# Altium PCB PCB1-C.PcbDoc (part 1 of 4)
Units mil, origin at the board's own origin, x right, y up, seen from the top; angles counter-clockwise.
Board outline 2476.38 x 3779.53 mil, 2 copper layers (Top Layer, Bottom Layer); 106 components, 105 nets, 404 pads, 256 vias.
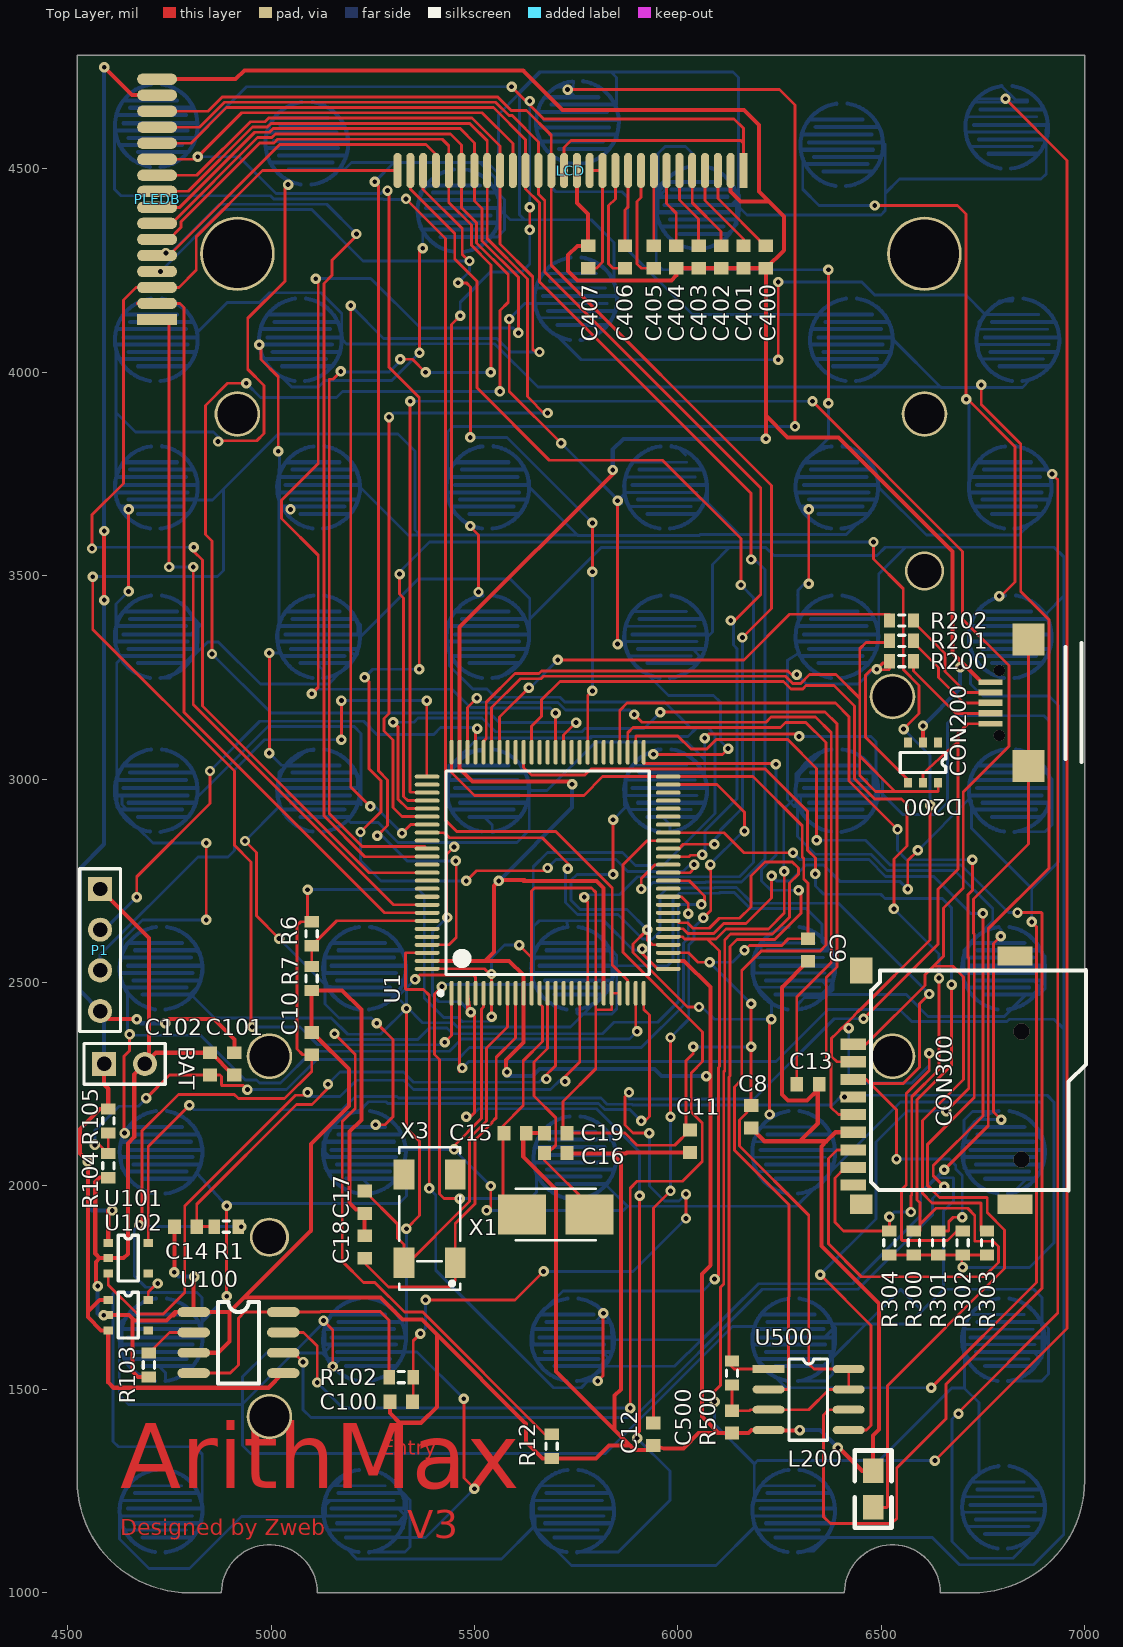
[diagram p0: Top Layer view]
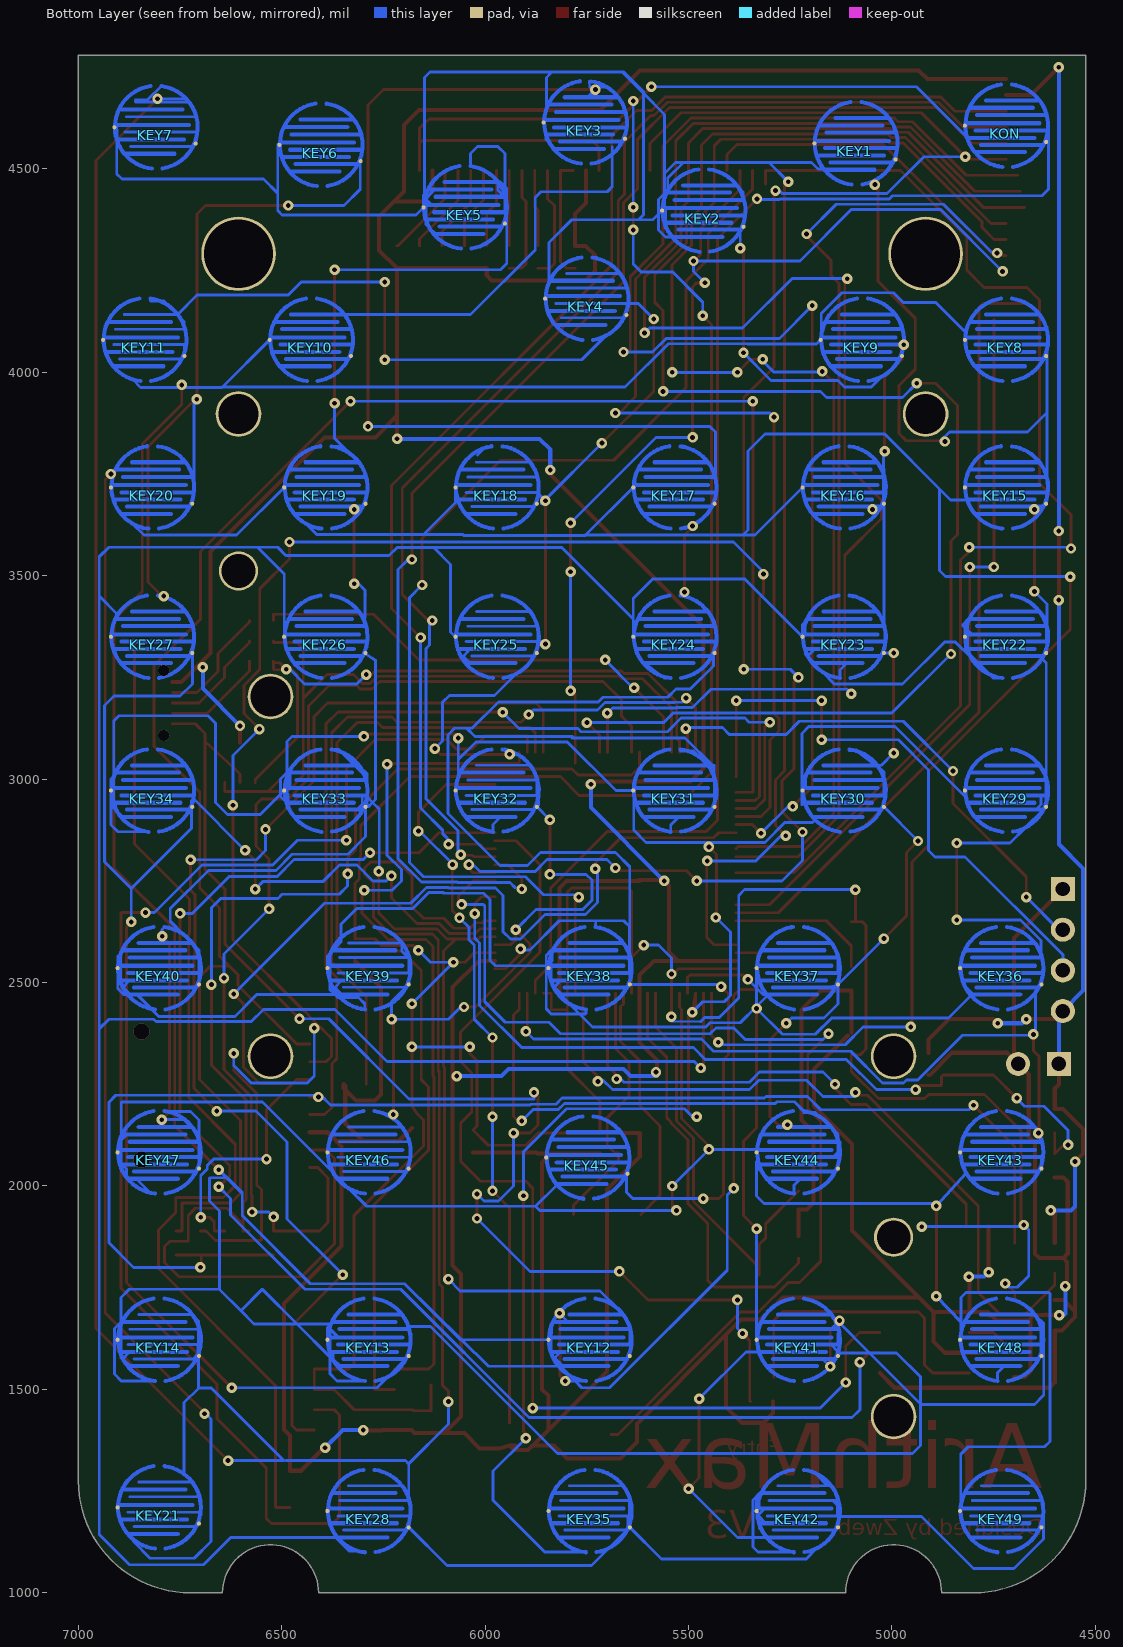
[diagram p1: Bottom Layer view, seen from below]

## Layer stack, top to bottom
Top Layer: signal copper 1.4
Dielectric: dielectric 12.6, FR-4, Dk 4.8
Bottom Layer: signal copper 1.4

## Board outline
4523.62,1275.59 ccw(c4799.21,1275.59) 4799.21,1000 4877.95,1000 cw(c4996.06,1000) 5114.17,1000 6409.45,1000 cw(c6527.56,1000) 6645.67,1000 6724.41,1000 ccw(c6724.41,1275.59) 7000,1275.59 7000,4779.53 4523.62,4779.53

## Design rules (kind name [scope] priority, off if disabled: settings)
Clearance [All] p1: gap=6
HoleSize [All] p1: absolutevalues=TRUE maxlimit=250 minlimit=11.81 maxpercent=80.000 minpercent=20.000
MinimumSolderMaskSliver [All] p1 off: minsoldermaskwidth=10
NetAntennae [All] p1 off: netantennaetolerance=0
PolygonConnect [All] p1: connectstyle=Relief reliefconductorwidth=10 reliefentries=4 polygonreliefangle="90 Angle"
RoutingVias [All] p1: holewidth=11.81 width=25.59 viastyle="Through Hole" minholewidth=11.81 minwidth=25.59 maxholewidth=11.81 maxwidth=25.59
SilkscreenOverComponentPads [All] p1: minsilkscreentomaskgap=10
SolderMaskExpansion [All] p1: expansion=4
Width [All] p1: maxlimit=20 minlimit=6 preferedwidth=7
24 further rules are at their usual default settings.

## Components (designator, comment, footprint, x,y, rotation, side; value= is the part's Value field where it differs from the comment)
BAT "Header 2" HDR1X2 4590,2300 r0 top
C8 "104" 1608[0603] 6180,2170 r270 top
C9 "104" 1608[0603] 6320,2580 r270 top
C10 "104" 1608[0603] 5100,2350 r90 top
C11 "104" 1608[0603] 6030,2110 r270 top
C12 "2.2uF" 1608[0603] 5940,1390 r270 top
C13 "2.2uF" 1608[0603] 6320,2250 r0 top
C14 "104" 1608[0603] 4790,1900 r0 top
C15 "22pF" 1608[0603] 5600,2130 r0 top
C16 "22pF" 1608[0603] 5700,2081 r0 top
C17 "12pF" 1608[0603] 5230,1960 r270 top
C18 "12pF" 1608[0603] 5230,1850 r90 top
C19 "4.7uF" 1608[0603] 5700,2130 r180 top
C100 "105" 1608[0603] 5320,1470 r0 top
C101 "105" 1608[0603] 4910,2300 r90 top
C102 "0.1uF" 1608[0603] 4850,2300 r270 top
C400 "2.2uF" 1608[0603] 6216.54,4283.46 r90 top
C401 "2.2uF" 1608[0603] 6161.42,4283.46 r90 top
C402 "2.2uF" 1608[0603] 6106.3,4283.46 r90 top
C403 "2.2uF" 1608[0603] 6051.18,4283.46 r90 top
C404 "2.2uF" 1608[0603] 5996.06,4283.46 r90 top
C405 "2.2uF" 1608[0603] 5940.94,4283.46 r90 top
C406 "0.1uF" 1608[0603] 5870.08,4283.46 r90 top
C407 "0.1uF" 1608[0603] 5779.53,4283.46 r270 top
C500 "104" 1608[0603] 6133.15,1420 r270 top
CON200 "USB-MINIAB" USB-MICRO 6874.02,3187.32 r90 top
CON300 "TF" TF-2 6630,2260 r0 top
D200 "AZC099-04S" SOT-23-6 6640,3090 r270 top
KEY1 "Button" Button#1 5311.02,4562.99 r180 bottom
KEY2 "Button" Button#2 5685.04,4397.64 r180 bottom
KEY3 "Button" Button#3 5976.38,4614.17 r180 bottom
KEY4 "Button" Button#4 5972.44,4181.1 r180 bottom
KEY5 "Button" Button#5 6271.65,4405.51 r180 bottom
KEY6 "Button" Button#6 6625.98,4559.06 r180 bottom
KEY7 "Button" Button#7 7031.5,4602.36 r180 bottom
KEY8 "Button" Button#8 4941,4080 r180 bottom
KEY9 "Button" Button#9 5295.28,4080 r180 bottom
KEY10 "Button" Button#10 6649.61,4080 r180 bottom
KEY11 "Button" Button#11 7059.06,4080 r180 bottom
KEY12 "Button" Button#12 5964.5,1622 r180 bottom
KEY13 "Button" Button#13 6507.9,1622 r180 bottom
KEY14 "Button" Button#14 7023.6,1622 r180 bottom
KEY15 "Button" Button#15 4941,3717 r180 bottom
KEY16 "Button" Button#16 5340,3717 r180 bottom
KEY17 "Button" Button#17 5756,3717 r180 bottom
KEY18 "Button" Button#18 6193,3717 r180 bottom
KEY19 "Button" Button#19 6614,3717 r180 bottom
KEY20 "Button" Button#20 7040,3717 r180 bottom
KEY21 "Button" Button#21 7023.6,1210 r180 bottom
KEY22 "Button" Button#22 4941,3350 r180 bottom
KEY23 "Button" Button#23 5340,3350 r180 bottom
KEY24 "Button" Button#24 5756,3350 r180 bottom
KEY25 "Button" Button#25 6193,3350 r180 bottom
KEY26 "Button" Button#26 6614,3350 r180 bottom
KEY27 "Button" Button#27 7040,3350 r180 bottom
KEY28 "Button" Button#28 6507.9,1201 r180 bottom
KEY29 "Button" Button#29 4941,2972 r180 bottom
KEY30 "Button" Button#30 5340,2972 r180 bottom
KEY31 "Button" Button#31 5756,2972 r180 bottom
KEY32 "Button" Button#32 6193,2972 r180 bottom
KEY33 "Button" Button#33 6614,2972 r180 bottom
KEY34 "Button" Button#34 7040,2972 r180 bottom
KEY35 "Button" Button#35 5964.5,1201 r180 bottom
KEY36 "Button" Button#36 4952.7,2535.4 r180 bottom
KEY37 "Button" Button#37 5452.7,2535.4 r180 bottom
KEY38 "Button" Button#38 5964.5,2535.4 r180 bottom
KEY39 "Button" Button#39 6507.9,2535.4 r180 bottom
KEY40 "Button" Button#40 7023.6,2535.4 r180 bottom
KEY41 "Button" Button#41 5452.7,1622 r180 bottom
KEY42 "Button" Button#42 5452.7,1201 r180 bottom
KEY43 "Button" Button#43 4952.7,2082.7 r180 bottom
KEY44 "Button" Button#44 5452.7,2082.7 r180 bottom
KEY45 "Button" Button#45 5970,2070 r180 bottom
KEY46 "Button" Button#46 6507.9,2082.7 r180 bottom
KEY47 "Button" Button#47 7023.6,2082.7 r180 bottom
KEY48 "Button" Button#48 4952.7,1622 r180 bottom
KEY49 "Button" Button#49 4952.7,1201 r180 bottom
KON "Button" Button#50 4941,4606.3 r180 bottom
L200 "BLM21PG221SN1" 0805 6480,1210 r90 top
LCD "FPC-QSG9631" LCD_28P 6161.42,4496.06 r270 top
P1 "Header 4" HDR1X4 4580,2730 r270 top
PLEDB "Header 16" CON_16P_1.0MM 4720,4130 r180 top
R1 "10K" J1-0603 4890,1900 r0 top
R6 "NC" J1-0603 5100,2620 r90 top
R7 "10K" J1-0603 5100,2510 r90 top
R12 "0R" J1-0603 5690,1360 r270 top
R102 "0.4R" J1-0603 5320,1530 r0 top
R103 "5K" J1-0603 4700,1560 r90 top
R104 "1M" J1-0603 4600,2050 r90 top
R105 "1M" J1-0603 4600,2160 r90 top
R200 "22R" J1-0603 6550,3290 r0 top
R201 "22R" J1-0603 6550,3340 r0 top
R202 "0R" J1-0603 6550,3390 r0 top
R300 "47K" J1-0603 6580,1860 r270 top
R301 "47K" J1-0603 6640,1860 r270 top
R302 "47K" J1-0603 6700,1860 r270 top
R303 "47K" J1-0603 6760,1860 r270 top
R304 "47K" J1-0603 6520,1860 r270 top
R500 "10K" J1-0603 6133.15,1540 r270 top
U1 "STM32F407VG" 100T1_L 5680,2770 r90 top
U100 "TP4056" SO-8 4810,1690 r0 top
U101 "ME6219" SOT-23-5 4600,1860 r0 top
U102 "ME6219" SOT-23-5 4600,1720 r0 top
U500 "W25X64" SOIC8 6223.15,1550 r0 top
X1 "25MHz" 5032 5700,1930 r180 top
X3 "MC306-G-06Q-32.768 (manufacturer JFVNY)" SM8 5390,1920 r90 top

## Footprints (in the part's own frame and the unit in brackets; to place one, negate y for a bottom-side part, rotate by r counter-clockwise, add the part's x,y. Pads: shape width x height; smd on the part's side, far side on the other; paste and mask are expansions set on the pad)
100T1_L [mm] "100-Pin Thin Quad Flat Pack 0.5 mm Pitch, IPC High Density"
  oval 1.55x0.25 smd: 1(-7.525,6) 2(-7.525,5.5) 3(-7.525,5) 4(-7.525,4.5) 5(-7.525,4) 6(-7.525,3.5) 7(-7.525,3) 8(-7.525,2.5) 9(-7.525,2) 10(-7.525,1.5) 11(-7.525,1) 12(-7.525,0.5) 13(-7.525,0) 14(-7.525,-0.5) 15(-7.525,-1) 16(-7.525,-1.5) 17(-7.525,-2) 18(-7.525,-2.5) 19(-7.525,-3) 20(-7.525,-3.5) 21(-7.525,-4) 22(-7.525,-4.5) 23(-7.525,-5) 24(-7.525,-5.5) 25(-7.525,-6) 51(7.525,-6) 52(7.525,-5.5) 53(7.525,-5) 54(7.525,-4.5) 55(7.525,-4) 56(7.525,-3.5) 57(7.525,-3) 58(7.525,-2.5) 59(7.525,-2) 60(7.525,-1.5) 61(7.525,-1) 62(7.525,-0.5) 63(7.525,0) 64(7.525,0.5) 65(7.525,1) 66(7.525,1.5) 67(7.525,2) 68(7.525,2.5) 69(7.525,3) 70(7.525,3.5) 71(7.525,4) 72(7.525,4.5) 73(7.525,5) 74(7.525,5.5) 75(7.525,6)
  oval 0.25x1.55 smd: 26(-6,-7.525) 27(-5.5,-7.525) 28(-5,-7.525) 29(-4.5,-7.525) 30(-4,-7.525) 31(-3.5,-7.525) 32(-3,-7.525) 33(-2.5,-7.525) 34(-2,-7.525) 35(-1.5,-7.525) 36(-1,-7.525) 37(-0.5,-7.525) 38(0,-7.525) 39(0.5,-7.525) 40(1,-7.525) 41(1.5,-7.525) 42(2,-7.525) 43(2.5,-7.525) 44(3,-7.525) 45(3.5,-7.525) 46(4,-7.525) 47(4.5,-7.525) 48(5,-7.525) 49(5.5,-7.525) 50(6,-7.525) 76(6,7.525) 77(5.5,7.525) 78(5,7.525) 79(4.5,7.525) 80(4,7.525) 81(3.5,7.525) 82(3,7.525) 83(2.5,7.525) 84(2,7.525) 85(1.5,7.525) 86(1,7.525) 87(0.5,7.525) 88(0,7.525) 89(-0.5,7.525) 90(-1,7.525) 91(-1.5,7.525) 92(-2,7.525) 93(-2.5,7.525) 94(-3,7.525) 95(-3.5,7.525) 96(-4,7.525) 97(-4.5,7.525) 98(-5,7.525) 99(-5.5,7.525) 100(-6,7.525)
  silkscreen extent -7.65,-6.35 6.35,6.8, body extent -7,-7 7,7, height 1.05
0805 [mil]
  rect 60x50 smd: 1(0,0) 2(90,0)
  silkscreen extent -50,-45 140,45
1608[0603] [mm] "Chip Capacitor, Body 1.6x0.8mm, IPC High Density"
  rect 0.8x0.9 smd: 1(-0.7,0) 2(0.7,0)
  body extent -0.87,-0.48 0.87,0.48, height 1.3
5032 [mm]
  rect 3x2.5 smd: 1(-2.1,0) 2(2.1,0)
  silkscreen extent -2.5,-1.6 2.5,1.6
Button#1 [mil]
  round 10 smd: 1(120,0) 2(320,-40)
  Top Layer lines w10: 320.19,-12 320.02,-12 319.02,-12 294.03,-12 146,-12 ; 319,26 150,26 ; 312,-47 292.02,-47 285.03,-47 160,-47 ; 304,6 126,6 ; 303,62 172,62 ; 291,-30 140.02,-30 127,-30 ; 287,44 158.03,44 134,44 ; 268,-65 149,-65 ; 324.51,-6.5 ccw(c222.55,-0.14) 321.16,26.58 ; 324.51,-6.5 cw(c222.55,-0.14) 320.19,-30.19 ; 324.51,-6.5 cw(c222.55,-0.14) 320.19,-30.19 ; 324.51,-6.5 cw(c222.55,-0.14) 320.19,-30.19 ; 324.51,-6.5 ccw(c222.55,-0.14) 321.16,26.58 ; 324.51,-6.5 cw(c222.55,-0.14) 320.19,-30.19 ; 324.51,-6.5 ccw(c222.55,-0.14) 321.16,26.58 ; 324.51,-6.5 ccw(c222.55,-0.14) 321.16,26.58 ; 321.16,26.58 ccw(c222.55,-0.14) 320.19,29.92 ; 321.16,26.58 ccw(c222.55,-0.14) 320.19,29.92 ; 321.16,26.58 ccw(c222.55,-0.14) 320.19,29.92 ; 321.16,26.58 ccw(c222.55,-0.14) 320.19,29.92 ; 320.19,-30.19 cw(c222.55,-0.14) 320.02,-30.73 ; 320.19,-30.19 cw(c222.55,-0.14) 320.02,-30.73 ; 320.19,-30.19 cw(c222.55,-0.14) 320.02,-30.73 ; 320.19,-30.19 cw(c222.55,-0.14) 320.02,-30.73 ; 320.19,29.92 ccw(c222.55,-0.14) 320.02,30.46 ; 320.19,29.92 ccw(c222.55,-0.14) 320.02,30.46 ; 320.19,29.92 ccw(c222.55,-0.14) 320.02,30.46 ; 320.19,29.92 ccw(c222.55,-0.14) 320.02,30.46 ; 320.02,-30.73 cw(c222.55,-0.14) 318.16,-36.13 ; 320.02,-30.73 cw(c222.55,-0.14) 318.16,-36.13 ; 320.02,-30.73 cw(c222.55,-0.14) 318.16,-36.13 ; 320.02,-30.73 cw(c222.55,-0.14) 318.16,-36.13 ; 320.02,30.46 ccw(c222.55,-0.14) 305.5,59.5 ; 320.02,30.46 ccw(c222.55,-0.14) 305.5,59.5 ; 320.02,30.46 ccw(c222.55,-0.14) 305.5,59.5 ; 320.02,30.46 ccw(c222.55,-0.14) 305.5,59.5 ; 318.16,-36.13 cw(c222.55,-0.14) 314.65,-44.35 ; 318.16,-36.13 cw(c222.55,-0.14) 314.65,-44.35 ; 318.16,-36.13 cw(c222.55,-0.14) 314.65,-44.35 ; 318.16,-36.13 cw(c222.55,-0.14) 314.65,-44.35 ; 314.65,-44.35 cw(c222.55,-0.14) 313.67,-46.33 ; 314.65,-44.35 cw(c222.55,-0.14) 313.67,-46.33 ; 314.65,-44.35 cw(c222.55,-0.14) 313.67,-46.33 ; 314.65,-44.35 cw(c222.55,-0.14) 313.67,-46.33 ; 313.67,-46.33 cw(c222.55,-0.14) 238.02,-101.12 ; 313.67,-46.33 cw(c222.55,-0.14) 238.02,-101.12 ; 313.67,-46.33 cw(c222.55,-0.14) 238.02,-101.12 ; 313.67,-46.33 cw(c222.55,-0.14) 238.02,-101.12 ; 305.5,59.5 ccw(c222.55,-0.14) 305.02,60.16 ; 305.5,59.5 ccw(c222.55,-0.14) 305.02,60.16 ; 305.5,59.5 ccw(c222.55,-0.14) 305.02,60.16 ; 305.5,59.5 ccw(c222.55,-0.14) 305.02,60.16 ; 305.02,60.16 ccw(c222.55,-0.14) 303.64,62 ; 305.02,60.16 ccw(c222.55,-0.14) 303.64,62 ; 305.02,60.16 ccw(c222.55,-0.14) 303.64,62 ; 305.02,60.16 ccw(c222.55,-0.14) 303.64,62 ; 303.64,62 ccw(c222.55,-0.14) 235.89,101.15 ; 303.64,62 ccw(c222.55,-0.14) 235.89,101.15 ; 303.64,62 ccw(c222.55,-0.14) 235.89,101.15 ; 303.64,62 ccw(c222.55,-0.14) 235.89,101.15 ; 211.96,-101.38 cw(c223.45,0.14) 144.74,-65 ; 211.96,-101.38 cw(c223.45,0.14) 144.74,-65 ; 211.96,-101.38 cw(c223.45,0.14) 144.74,-65 ; 211.96,-101.38 cw(c223.45,0.14) 144.74,-65 ; 208.82,101.24 ccw(c223.45,0.14) 141.24,60.79 ; 208.82,101.24 ccw(c223.45,0.14) 141.24,60.79 ; 208.82,101.24 ccw(c223.45,0.14) 141.24,60.79 ; 208.82,101.24 ccw(c223.45,0.14) 141.24,60.79 ; 144.74,-65 cw(c223.45,0.14) 143.13,-62.99 ; 144.74,-65 cw(c223.45,0.14) 143.13,-62.99 ; 144.74,-65 cw(c223.45,0.14) 143.13,-62.99 ; 144.74,-65 cw(c223.45,0.14) 143.13,-62.99 ; 143.13,-62.99 cw(c223.45,0.14) 139.02,-57.39 ; 143.13,-62.99 cw(c223.45,0.14) 139.02,-57.39 ; 143.13,-62.99 cw(c223.45,0.14) 139.02,-57.39 ; 143.13,-62.99 cw(c223.45,0.14) 139.02,-57.39 ; 141.24,60.79 ccw(c223.45,0.14) 131.18,44 ; 141.24,60.79 ccw(c223.45,0.14) 131.18,44 ; 141.24,60.79 ccw(c223.45,0.14) 131.18,44 ; 141.24,60.79 ccw(c223.45,0.14) 131.18,44 ; 139.02,-57.39 cw(c223.45,0.14) 135.01,-51.02 ; 139.02,-57.39 cw(c223.45,0.14) 135.01,-51.02 ; 139.02,-57.39 cw(c223.45,0.14) 135.01,-51.02 ; 139.02,-57.39 cw(c223.45,0.14) 135.01,-51.02 ; 135.01,-51.02 cw(c223.45,0.14) 125.83,-30 ; 135.01,-51.02 cw(c223.45,0.14) 125.83,-30 ; 135.01,-51.02 cw(c223.45,0.14) 125.83,-30 ; 135.01,-51.02 cw(c223.45,0.14) 125.83,-30 ; 131.18,44 ccw(c223.45,0.14) 128.95,38.95 ; 131.18,44 ccw(c223.45,0.14) 128.95,38.95 ; 131.18,44 ccw(c223.45,0.14) 128.95,38.95 ; 131.18,44 ccw(c223.45,0.14) 128.95,38.95 ; 128.95,38.95 ccw(c223.45,0.14) 121.46,6 ; 128.95,38.95 ccw(c223.45,0.14) 121.46,6 ; 128.95,38.95 ccw(c223.45,0.14) 121.46,6 ; 128.95,38.95 ccw(c223.45,0.14) 121.46,6 ; 125.83,-30 cw(c223.45,0.14) 125.33,-28.34 ; 125.83,-30 cw(c223.45,0.14) 125.33,-28.34 ; 125.83,-30 cw(c223.45,0.14) 125.33,-28.34 ; 125.83,-30 cw(c223.45,0.14) 125.33,-28.34 ; 125.33,-28.34 cw(c223.45,0.14) 121.46,6 ; 125.33,-28.34 cw(c223.45,0.14) 121.46,6 ; 125.33,-28.34 cw(c223.45,0.14) 121.46,6 ; 125.33,-28.34 cw(c223.45,0.14) 121.46,6
Button#2 [mil]
  round 10 smd: 1(120,0) 2(320,-40)
  Top Layer lines w10: 320.19,-12 146,-12 ; 319,26 150,26 ; 312,-47 160,-47 ; 304,6 129.04,6 128.04,6 127,6 126,6 ; 303,62 172,62 ; 291,-30 129.04,-30 128.04,-30 127,-30 ; 287,44 144.68,44 134,44 ; 268,-65 149,-65 ; 323.97,-12.46 cw(c222.55,-0.14) 316.61,-40 ; 323.97,-12.46 ccw(c222.55,-0.14) 319,33.55 ; 323.97,-12.46 ccw(c222.55,-0.14) 319,33.55 ; 323.97,-12.46 cw(c222.55,-0.14) 316.61,-40 ; 323.97,-12.46 cw(c222.55,-0.14) 316.61,-40 ; 323.97,-12.46 cw(c222.55,-0.14) 316.61,-40 ; 323.97,-12.46 ccw(c222.55,-0.14) 319,33.55 ; 323.97,-12.46 ccw(c222.55,-0.14) 319,33.55 ; 319,33.55 ccw(c222.55,-0.14) 305.5,59.5 ; 319,33.55 ccw(c222.55,-0.14) 305.5,59.5 ; 319,33.55 ccw(c222.55,-0.14) 305.5,59.5 ; 319,33.55 ccw(c222.55,-0.14) 305.5,59.5 ; 316.61,-40 cw(c222.55,-0.14) 312,-49.49 ; 316.61,-40 cw(c222.55,-0.14) 312,-49.49 ; 316.61,-40 cw(c222.55,-0.14) 312,-49.49 ; 316.61,-40 cw(c222.55,-0.14) 312,-49.49 ; 312,-49.49 cw(c222.55,-0.14) 279.04,-85.26 ; 312,-49.49 cw(c222.55,-0.14) 279.04,-85.26 ; 312,-49.49 cw(c222.55,-0.14) 279.04,-85.26 ; 312,-49.49 cw(c222.55,-0.14) 279.04,-85.26 ; 305.5,59.5 ccw(c222.55,-0.14) 235.89,101.15 ; 305.5,59.5 ccw(c222.55,-0.14) 235.89,101.15 ; 305.5,59.5 ccw(c222.55,-0.14) 235.89,101.15 ; 305.5,59.5 ccw(c222.55,-0.14) 235.89,101.15 ; 279.04,-85.26 cw(c222.55,-0.14) 238.02,-101.12 ; 279.04,-85.26 cw(c222.55,-0.14) 238.02,-101.12 ; 279.04,-85.26 cw(c222.55,-0.14) 238.02,-101.12 ; 279.04,-85.26 cw(c222.55,-0.14) 238.02,-101.12 ; 211.96,-101.38 cw(c223.45,0.14) 172.3,-88.3 ; 211.96,-101.38 cw(c223.45,0.14) 172.3,-88.3 ; 211.96,-101.38 cw(c223.45,0.14) 172.3,-88.3 ; 211.96,-101.38 cw(c223.45,0.14) 172.3,-88.3 ; 208.82,101.24 ccw(c223.45,0.14) 179.95,92.57 ; 208.82,101.24 ccw(c223.45,0.14) 179.95,92.57 ; 208.82,101.24 ccw(c223.45,0.14) 179.94,92.57 ; 208.82,101.24 ccw(c223.45,0.14) 179.94,92.57 ; 179.94,92.57 ccw(c223.45,0.14) 134,49.49 ; 179.94,92.57 ccw(c223.45,0.14) 134,49.49 ; 179.94,92.57 ccw(c223.45,0.14) 134,49.49 ; 179.94,92.57 ccw(c223.45,0.14) 134,49.49 ; 172.3,-88.3 cw(c223.45,0.14) 144.74,-65 ; 172.3,-88.3 cw(c223.45,0.14) 144.74,-65 ; 172.3,-88.3 cw(c223.45,0.14) 144.74,-65 ; 172.3,-88.3 cw(c223.45,0.14) 144.74,-65 ; 144.74,-65 cw(c223.45,0.14) 142.2,-61.8 ; 144.74,-65 cw(c223.45,0.14) 142.2,-61.8 ; 144.74,-65 cw(c223.45,0.14) 142.2,-61.8 ; 144.74,-65 cw(c223.45,0.14) 142.2,-61.8 ; 142.2,-61.8 cw(c223.45,0.14) 135.01,-51.02 ; 142.2,-61.8 cw(c223.45,0.14) 135.01,-51.02 ; 142.2,-61.8 cw(c223.45,0.14) 135.01,-51.02 ; 142.2,-61.8 cw(c223.45,0.14) 135.01,-51.02 ; 135.01,-51.02 cw(c223.45,0.14) 128.04,-36.39 ; 135.01,-51.02 cw(c223.45,0.14) 128.04,-36.39 ; 135.01,-51.02 cw(c223.45,0.14) 128.04,-36.39 ; 135.01,-51.02 cw(c223.45,0.14) 128.04,-36.39 ; 134,49.49 ccw(c223.45,0.14) 131.18,44 ; 134,49.49 ccw(c223.45,0.14) 131.18,44 ; 134,49.49 ccw(c223.45,0.14) 131.18,44 ; 134,49.49 ccw(c223.45,0.14) 131.18,44 ; 131.18,44 ccw(c223.45,0.14) 128.95,38.95 ; 131.18,44 ccw(c223.45,0.14) 128.95,38.95 ; 131.18,44 ccw(c223.45,0.14) 128.95,38.95 ; 131.18,44 ccw(c223.45,0.14) 128.95,38.95 ; 128.95,38.95 ccw(c223.45,0.14) 127,33.82 ; 128.95,38.95 ccw(c223.45,0.14) 127,33.82 ; 128.95,38.95 ccw(c223.45,0.14) 127,33.82 ; 128.95,38.95 ccw(c223.45,0.14) 127,33.82 ; 128.04,-36.39 cw(c223.45,0.14) 127,-33.55 ; 128.04,-36.39 cw(c223.45,0.14) 127,-33.55 ; 128.04,-36.39 cw(c223.45,0.14) 127,-33.55 ; 128.04,-36.39 cw(c223.45,0.14) 127,-33.55 ; 127,-33.55 cw(c223.45,0.14) 121.3,-1.3 ; 127,-33.55 cw(c223.45,0.14) 121.3,-1.3 ; 127,-33.55 cw(c223.45,0.14) 121.3,-1.3 ; 127,-33.55 cw(c223.45,0.14) 121.3,-1.3 ; 127,33.82 ccw(c223.45,0.14) 126,30.8 ; 127,33.82 ccw(c223.45,0.14) 126,30.8 ; 127,33.82 ccw(c223.45,0.14) 126,30.8 ; 127,33.82 ccw(c223.45,0.14) 126,30.8 ; 126,30.8 ccw(c223.45,0.14) 121.46,6 ; 126,30.8 ccw(c223.45,0.14) 121.46,6 ; 126,30.8 ccw(c223.45,0.14) 121.46,6 ; 126,30.8 ccw(c223.45,0.14) 121.46,6 ; 121.46,6 ccw(c223.45,0.14) 121.29,1.36 ; 121.46,6 ccw(c223.45,0.14) 121.29,1.36 ; 121.46,6 ccw(c223.45,0.14) 121.29,1.36 ; 121.46,6 ccw(c223.45,0.14) 121.29,1.36 ; 121.3,-1.3 cw(c223.45,0.14) 121.29,1.29 ; 121.3,-1.3 cw(c223.45,0.14) 121.29,1.29 ; 121.3,-1.3 cw(c223.45,0.14) 121.29,1.29 ; 121.3,-1.3 cw(c223.45,0.14) 121.29,1.29 ; 121.29,1.3 cw(c223.45,0.14) 121.29,1.36 ; 121.29,1.3 cw(c223.45,0.14) 121.29,1.36 ; 121.29,1.3 cw(c223.45,0.14) 121.29,1.36 ; 121.29,1.3 cw(c223.45,0.14) 121.29,1.36
Button#3 [mil]
  round 10 smd: 1(120,0) 2(320,-40)
  Top Layer lines w10: 320.19,-12 319,-12 146,-12 ; 319,26 318.63,26 309.2,26 150,26 ; 312,-47 276.38,-47 160,-47 ; 304,6 132.38,6 131.38,6 127,6 126,6 ; 303,62 299.2,62 289.7,62 228.55,62 172,62 ; 291,-30 132.38,-30 131.38,-30 127,-30 ; 287,44 134,44 ; 268,-65 149,-65 ; 238.02,-101.12 ccw(c222.55,-0.14) 288.88,-77.84 ccw(c222.55,-0.14) 313.33,-47 ccw(c222.55,-0.14) 313.67,-46.32 ccw(c222.55,-0.14) 319,33.55 ccw(c222.55,-0.14) 317.14,38.46 ccw(c222.55,-0.14) 312.02,49.19 ccw(c222.55,-0.14) 305.5,59.5 ccw(c222.55,-0.14) 235.89,101.15 ; 211.96,-101.38 cw(c223.45,0.14) 144.74,-65 cw(c223.45,0.14) 135.01,-51.01 cw(c223.45,0.14) 131.38,-44.14 cw(c223.45,0.14) 126,-30.53 cw(c223.45,0.14) 125.59,-29.22 cw(c223.45,0.14) 121.29,1.29 cw(c223.45,0.14) 121.46,6 cw(c223.45,0.14) 127,33.82 cw(c223.45,0.14) 128.95,38.95 cw(c223.45,0.14) 131.18,44 cw(c223.45,0.14) 208.82,101.24
Button#4 [mil]
  round 10 smd: 1(120,0) 2(320,-40)
  Top Layer lines w7: 320.19,-12 319,-12 309.94,-12 146,-12 ; 319,26 304.94,26 150,26 ; 312,-47 309.94,-47 291.44,-47 278.34,-47 160,-47 ; 303,62 301.44,62 229.44,62 196.54,62 172,62
  Top Layer lines w10: 304,6 134.94,6 129.44,6 127,6 126,6 ; 291,-30 134.94,-30 129.44,-30 127,-30 ; 287,44 134,44 ; 268,-65 149,-65 ; 238.02,-101.12 ccw(c222.55,-0.14) 268.74,-91.26 ccw(c222.55,-0.14) 313.67,-46.33 ccw(c222.55,-0.14) 314.37,-44.93 ccw(c222.55,-0.14) 316.37,-40.57 ccw(c222.55,-0.14) 319,-33.82 ccw(c222.55,-0.14) 324.02,-12 ccw(c222.55,-0.14) 324.54,-6.02 ccw(c222.55,-0.14) 324.54,5.75 ccw(c222.55,-0.14) 324.5,6.44 ccw(c222.55,-0.14) 324.44,7.31 ccw(c222.55,-0.14) 320.19,29.91 ccw(c222.55,-0.14) 319,33.55 ccw(c222.55,-0.14) 308.76,54.68 ccw(c222.55,-0.14) 305.5,59.5 ccw(c222.55,-0.14) 296.93,69.9 ccw(c222.55,-0.14) 235.89,101.15 ; 211.96,-101.38 cw(c223.45,0.14) 209.74,-101.1 cw(c223.45,0.14) 137.45,-55.01 cw(c223.45,0.14) 135.01,-51.01 cw(c223.45,0.14) 129.44,-39.86 cw(c223.45,0.14) 127,-33.55 cw(c223.45,0.14) 122.9,-17.96 cw(c223.45,0.14) 121.56,-7.38 cw(c223.45,0.14) 121.29,0 cw(c223.45,0.14) 126,30.81 cw(c223.45,0.14) 127,33.82 cw(c223.45,0.14) 128.95,38.94 cw(c223.45,0.14) 129.44,40.13 cw(c223.45,0.14) 131.18,44 cw(c223.45,0.14) 208.82,101.24
Button#5 [mil]
  round 10 smd: 1(120,0) 2(320,-40)
  Top Layer lines w10: 320.19,-12 146,-12 ; 319,26 150,26 ; 312,-47 160,-47 ; 304,6 140.65,6 127,6 126,6 ; 303,62 172,62 ; 291,-30 134.15,-30 127,-30 ; 287,44 146.65,44 134.15,44 134,44 ; 268,-65 149,-65 ; 238.02,-101.12 ccw(c222.55,-0.14) 313.33,-47 ccw(c222.55,-0.14) 324.65,-3.6 ccw(c222.55,-0.14) 324.65,3.33 ccw(c222.55,-0.14) 320.19,29.92 ccw(c222.55,-0.14) 303.64,62 ccw(c222.55,-0.14) 235.89,101.15 ; 211.96,-101.38 cw(c223.45,0.14) 144.74,-65 cw(c223.45,0.14) 135.01,-51.01 cw(c223.45,0.14) 126,-30.53 cw(c223.45,0.14) 125.83,-30 cw(c223.45,0.14) 123.08,-18.93 cw(c223.45,0.14) 122.65,-16.51 cw(c223.45,0.14) 121.65,-8.5 cw(c223.45,0.14) 121.29,0 cw(c223.45,0.14) 121.46,6 cw(c223.45,0.14) 121.65,8.77 cw(c223.45,0.14) 122.65,16.79 cw(c223.45,0.14) 127,33.82 cw(c223.45,0.14) 128.84,38.69 cw(c223.45,0.14) 128.95,38.95 cw(c223.45,0.14) 208.82,101.24
Button#6 [mil]
  round 10 smd: 1(120,0) 2(320,-40)
  Top Layer lines w10: 320.19,-12 319,-12 ; 312,-47 306.04,-47 304.98,-47 160,-47 ; 304,6 136.04,6 127,6 126,6 ; 303,62 300.98,62 172,62 ; 291,-30 141.93,-30 131.98,-30 127,-30 ; 287,44 134,44 ; 268,-65 225.98,-65 149.43,-65 149,-65 ; 211.96,-101.38 cw(c223.45,0.14) 146.7,-67.3 cw(c223.45,0.14) 144.79,-65.06 cw(c223.45,0.14) 134.44,-50.01 cw(c223.45,0.14) 130.98,-43.31 cw(c223.45,0.14) 121.29,1.29 cw(c223.45,0.14) 121.46,6 cw(c223.45,0.14) 127,33.82 cw(c223.45,0.14) 128.95,38.95 cw(c223.45,0.14) 131.18,44 cw(c223.45,0.14) 208.82,101.24 ; 150,26 318.98,26 ; 146,-12 300.98,-12 313.48,-12 318.98,-12 ; 324.71,-0.77 cw(c222.55,-0.14) 321.98,-23.59 ; 324.71,-0.77 cw(c222.55,-0.14) 321.98,-23.59 ; 324.71,-0.77 cw(c222.55,-0.14) 321.98,-23.59 ; 324.71,-0.77 cw(c222.55,-0.14) 321.98,-23.59 ; 324.71,-0.77 ccw(c222.55,-0.14) 321.31,26 ; 324.71,-0.77 ccw(c222.55,-0.14) 321.31,26 ; 324.71,-0.77 ccw(c222.55,-0.14) 321.31,26 ; 324.71,-0.77 ccw(c222.55,-0.14) 321.31,26 ; 321.98,-23.59 cw(c222.55,-0.14) 319,-33.82 ; 321.98,-23.59 cw(c222.55,-0.14) 319,-33.82 ; 321.98,-23.59 cw(c222.55,-0.14) 319,-33.82 ; 321.98,-23.59 cw(c222.55,-0.14) 319,-33.82 ; 321.31,26 ccw(c222.55,-0.14) 318.98,33.59 ; 321.31,26 ccw(c222.55,-0.14) 318.98,33.59 ; 321.31,26 ccw(c222.55,-0.14) 318.98,33.59 ; 321.31,26 ccw(c222.55,-0.14) 318.98,33.59 ; 318.98,-33.86 ccw(c222.55,-0.14) 319,-33.82 ; 318.98,-33.86 ccw(c222.55,-0.14) 319,-33.82 ; 318.98,-33.86 ccw(c222.55,-0.14) 319,-33.82 ; 318.98,-33.86 ccw(c222.55,-0.14) 319,-33.82 ; 318.98,-33.86 cw(c222.55,-0.14) 318.92,-34.06 ; 318.98,-33.86 cw(c222.55,-0.14) 318.92,-34.06 ; 318.98,-33.86 cw(c222.55,-0.14) 318.92,-34.06 ; 318.98,-33.86 cw(c222.55,-0.14) 318.92,-34.06 ; 319,-12 318.98,-12 ; 319,26 318.98,26 ; 318.98,33.59 ccw(c222.55,-0.14) 309.53,53.46 ; 318.98,33.59 ccw(c222.55,-0.14) 309.53,53.46 ; 318.98,33.59 ccw(c222.55,-0.14) 309.53,53.46 ; 318.98,33.59 ccw(c222.55,-0.14) 309.53,53.46 ; 318.92,-34.06 cw(c222.55,-0.14) 313.33,-47 ; 318.92,-34.06 cw(c222.55,-0.14) 313.33,-47 ; 318.92,-34.06 cw(c222.55,-0.14) 313.33,-47 ; 318.92,-34.06 cw(c222.55,-0.14) 313.33,-47 ; 313.33,-47 cw(c222.55,-0.14) 266.77,-92.23 ; 313.33,-47 cw(c222.55,-0.14) 266.77,-92.23 ; 313.33,-47 cw(c222.55,-0.14) 266.77,-92.23 ; 313.33,-47 cw(c222.55,-0.14) 266.77,-92.23 ; 309.53,53.46 ccw(c222.55,-0.14) 303.4,62.31 ; 309.53,53.46 ccw(c222.55,-0.14) 303.4,62.31 ; 309.53,53.46 ccw(c222.55,-0.14) 303.4,62.31 ; 309.53,53.46 ccw(c222.55,-0.14) 303.4,62.31 ; 303.4,62.31 ccw(c222.55,-0.14) 235.89,101.15 ; 303.4,62.31 ccw(c222.55,-0.14) 235.89,101.15 ; 303.4,62.31 ccw(c222.55,-0.14) 235.89,101.15 ; 303.4,62.31 ccw(c222.55,-0.14) 235.89,101.15 ; 266.77,-92.23 cw(c222.55,-0.14) 238.02,-101.12 ; 266.77,-92.23 cw(c222.55,-0.14) 238.02,-101.12 ; 266.77,-92.23 cw(c222.55,-0.14) 238.02,-101.12 ; 266.77,-92.23 cw(c222.55,-0.14) 238.02,-101.12
Button#7 [mil]
  round 10 smd: 1(120,0) 2(320,-40)
  Top Layer lines w7: 320.19,-12 319,-12 306.5,-12 146,-12 ; 319,26 150,26 ; 312,-47 160,-47 ; 303,62 225.99,62 172,62
  Top Layer lines w10: 304,6 131.5,6 126,6 ; 291,-30 131.5,-30 127,-30 ; 287,44 134,44 ; 268,-65 149,-65 ; 238.02,-101.12 ccw(c222.55,-0.14) 313.33,-47 ccw(c222.55,-0.14) 320,-30.81 ccw(c222.55,-0.14) 324.43,-7.77 ccw(c222.55,-0.14) 322.08,22.92 ccw(c222.55,-0.14) 235.89,101.15 ; 211.96,-101.38 cw(c223.45,0.14) 144.74,-65 ; 211.96,-101.38 cw(c223.45,0.14) 144.74,-65 ; 211.96,-101.38 cw(c223.45,0.14) 144.74,-65 ; 211.96,-101.38 cw(c223.45,0.14) 144.74,-65 ; 208.82,101.24 ccw(c223.45,0.14) 130.91,43.41 ; 208.82,101.24 ccw(c223.45,0.14) 130.91,43.41 ; 208.82,101.24 ccw(c223.45,0.14) 130.91,43.41 ; 208.82,101.24 ccw(c223.45,0.14) 130.91,43.41 ; 144.74,-65 cw(c223.45,0.14) 135.01,-51.01 ; 144.74,-65 cw(c223.45,0.14) 135.01,-51.01 ; 144.74,-65 cw(c223.45,0.14) 135.01,-51.01 ; 144.74,-65 cw(c223.45,0.14) 135.01,-51.01 ; 135.01,-51.01 cw(c223.45,0.14) 131.5,-44.38 ; 135.01,-51.01 cw(c223.45,0.14) 131.5,-44.38 ; 135.01,-51.01 cw(c223.45,0.14) 131.5,-44.38 ; 135.01,-51.01 cw(c223.45,0.14) 131.5,-44.38 ; 131.5,-44.38 cw(c223.45,0.14) 126,-30.54 ; 131.5,-44.38 cw(c223.45,0.14) 126,-30.54 ; 131.5,-44.38 cw(c223.45,0.14) 126,-30.54 ; 131.5,-44.38 cw(c223.45,0.14) 126,-30.54 ; 130.91,43.41 ccw(c223.45,0.14) 128.95,38.95 ; 130.91,43.41 ccw(c223.45,0.14) 128.95,38.95 ; 130.91,43.41 ccw(c223.45,0.14) 128.95,38.95 ; 130.91,43.41 ccw(c223.45,0.14) 128.95,38.95 ; 128.95,38.95 ccw(c223.45,0.14) 121.47,6.27 ; 128.95,38.95 ccw(c223.45,0.14) 121.47,6.27 ; 128.95,38.95 ccw(c223.45,0.14) 121.47,6.27 ; 128.95,38.95 ccw(c223.45,0.14) 121.47,6.27 ; 126,-30.54 cw(c223.45,0.14) 125.49,-28.85 ; 126,-30.54 cw(c223.45,0.14) 125.49,-28.85 ; 126,-30.54 cw(c223.45,0.14) 125.49,-28.85 ; 126,-30.54 cw(c223.45,0.14) 125.49,-28.85 ; 125.49,-28.85 cw(c223.45,0.14) 125.33,-28.33 ; 125.49,-28.85 cw(c223.45,0.14) 125.33,-28.33 ; 125.49,-28.85 cw(c223.45,0.14) 125.33,-28.33 ; 125.49,-28.85 cw(c223.45,0.14) 125.33,-28.33 ; 125.33,-28.33 cw(c223.45,0.14) 121.47,-6 ; 125.33,-28.33 cw(c223.45,0.14) 121.47,-6 ; 125.33,-28.33 cw(c223.45,0.14) 121.47,-6 ; 125.33,-28.33 cw(c223.45,0.14) 121.47,-6 ; 121.47,-6 cw(c223.45,0.14) 121.38,-4.12 ; 121.47,-6 cw(c223.45,0.14) 121.38,-4.12 ; 121.47,-6 cw(c223.45,0.14) 121.38,-4.12 ; 121.47,-6 cw(c223.45,0.14) 121.38,-4.12 ; 121.47,6.27 ccw(c223.45,0.14) 121.29,1.29 ; 121.47,6.27 ccw(c223.45,0.14) 121.29,1.29 ; 121.47,6.27 ccw(c223.45,0.14) 121.29,1.29 ; 121.47,6.27 ccw(c223.45,0.14) 121.29,1.29 ; 121.38,-4.12 cw(c223.45,0.14) 121.3,-1.3 ; 121.38,-4.12 cw(c223.45,0.14) 121.3,-1.3 ; 121.38,-4.12 cw(c223.45,0.14) 121.3,-1.3 ; 121.38,-4.12 cw(c223.45,0.14) 121.3,-1.3 ; 121.3,-1.3 cw(c223.45,0.14) 121.29,1.29 ; 121.3,-1.3 cw(c223.45,0.14) 121.29,1.29 ; 121.3,-1.3 cw(c223.45,0.14) 121.29,1.29 ; 121.3,-1.3 cw(c223.45,0.14) 121.29,1.29
Button#8 [mil]
  round 10 smd: 1(120,0) 2(320,-40)
  Top Layer lines w10: 320.19,-12 320,-12 319,-12 308.5,-12 146,-12 ; 319,26 305.5,26 150,26 ; 312,-47 291,-47 160,-47 ; 304,6 141,6 131,6 127,6 126,6 ; 303,62 172,62 ; 291,-30 143,-30 131,-30 127,-30 ; 287,44 134,44 ; 268,-65 153.5,-65 149,-65 ; 324.53,5.97 ccw(c222.55,-0.14) 324.46,7.04 ; 324.53,5.97 ccw(c222.55,-0.14) 324.46,7.04 ; 324.53,5.97 ccw(c222.55,-0.14) 324.46,7.04 ; 324.53,5.97 ccw(c222.55,-0.14) 324.46,7.04 ; 324.53,5.97 cw(c222.55,-0.14) 322,-23.52 ; 324.53,5.97 cw(c222.55,-0.14) 322,-23.52 ; 324.53,5.97 cw(c222.55,-0.14) 322,-23.52 ; 324.53,5.97 cw(c222.55,-0.14) 322,-23.52 ; 324.46,7.04 ccw(c222.55,-0.14) 322,23.25 ; 324.46,7.04 ccw(c222.55,-0.14) 322,23.25 ; 324.46,7.04 ccw(c222.55,-0.14) 322,23.25 ; 324.46,7.04 ccw(c222.55,-0.14) 322,23.25 ; 322,-23.52 cw(c222.55,-0.14) 320.19,-30.19 ; 322,-23.52 cw(c222.55,-0.14) 320.19,-30.19 ; 322,-23.52 cw(c222.55,-0.14) 320.19,-30.19 ; 322,-23.52 cw(c222.55,-0.14) 320.19,-30.19 ; 322,23.25 ccw(c222.55,-0.14) 320.19,29.92 ; 322,23.25 ccw(c222.55,-0.14) 320.19,29.92 ; 322,23.25 ccw(c222.55,-0.14) 320.19,29.92 ; 322,23.25 ccw(c222.55,-0.14) 320.19,29.92 ; 320.19,-30.19 cw(c222.55,-0.14) 320,-30.81 ; 320.19,-30.19 cw(c222.55,-0.14) 320,-30.81 ; 320.19,-30.19 cw(c222.55,-0.14) 320,-30.81 ; 320.19,-30.19 cw(c222.55,-0.14) 320,-30.81 ; 320.19,29.92 ccw(c222.55,-0.14) 320,30.53 ; 320.19,29.92 ccw(c222.55,-0.14) 320,30.53 ; 320.19,29.92 ccw(c222.55,-0.14) 320,30.53 ; 320.19,29.92 ccw(c222.55,-0.14) 320,30.53 ; 320,-30.81 cw(c222.55,-0.14) 316.61,-40 ; 320,-30.81 cw(c222.55,-0.14) 316.61,-40 ; 320,-30.81 cw(c222.55,-0.14) 316.61,-40 ; 320,-30.81 cw(c222.55,-0.14) 316.61,-40 ; 320,30.53 ccw(c222.55,-0.14) 305.5,59.5 ; 320,30.53 ccw(c222.55,-0.14) 305.5,59.5 ; 320,30.53 ccw(c222.55,-0.14) 305.5,59.5 ; 320,30.53 ccw(c222.55,-0.14) 305.5,59.5 ; 316.61,-40 cw(c222.55,-0.14) 316,-41.42 ; 316.61,-40 cw(c222.55,-0.14) 316,-41.42 ; 316.61,-40 cw(c222.55,-0.14) 316,-41.42 ; 316.61,-40 cw(c222.55,-0.14) 316,-41.42 ; 316,-41.42 cw(c222.55,-0.14) 313.67,-46.33 ; 316,-41.42 cw(c222.55,-0.14) 313.67,-46.33 ; 316,-41.42 cw(c222.55,-0.14) 313.67,-46.33 ; 316,-41.42 cw(c222.55,-0.14) 313.67,-46.33 ; 313.67,-46.33 cw(c222.55,-0.14) 313.33,-47 ; 313.67,-46.33 cw(c222.55,-0.14) 313.33,-47 ; 313.67,-46.33 cw(c222.55,-0.14) 313.33,-47 ; 313.67,-46.33 cw(c222.55,-0.14) 313.33,-47 ; 313.33,-47 cw(c222.55,-0.14) 304.77,-60.77 ; 313.33,-47 cw(c222.55,-0.14) 304.77,-60.77 ; 313.33,-47 cw(c222.55,-0.14) 304.77,-60.77 ; 313.33,-47 cw(c222.55,-0.14) 304.77,-60.77 ; 305.5,59.5 ccw(c222.55,-0.14) 303.64,62 ; 305.5,59.5 ccw(c222.55,-0.14) 303.64,62 ; 305.5,59.5 ccw(c222.55,-0.14) 303.64,62 ; 305.5,59.5 ccw(c222.55,-0.14) 303.64,62 ; 304.77,-60.77 cw(c222.55,-0.14) 268.74,-91.26 ; 304.77,-60.77 cw(c222.55,-0.14) 268.74,-91.26 ; 304.77,-60.77 cw(c222.55,-0.14) 268.74,-91.26 ; 304.77,-60.77 cw(c222.55,-0.14) 268.74,-91.26 ; 303.64,62 ccw(c222.55,-0.14) 282.18,82.82 ; 303.64,62 ccw(c222.55,-0.14) 282.18,82.82 ; 303.64,62 ccw(c222.55,-0.14) 282.18,82.82 ; 303.64,62 ccw(c222.55,-0.14) 282.18,82.82 ; 282.18,82.82 ccw(c222.55,-0.14) 235.89,101.15 ; 282.18,82.82 ccw(c222.55,-0.14) 235.89,101.15 ; 282.18,82.82 ccw(c222.55,-0.14) 235.89,101.15 ; 282.18,82.82 ccw(c222.55,-0.14) 235.89,101.15 ; 268.74,-91.26 cw(c222.55,-0.14) 238.02,-101.12 ; 268.74,-91.26 cw(c222.55,-0.14) 238.02,-101.12 ; 268.74,-91.26 cw(c222.55,-0.14) 238.02,-101.12 ; 268.74,-91.26 cw(c222.55,-0.14) 238.02,-101.12 ; 211.96,-101.38 cw(c223.45,0.14) 144.74,-65 ; 211.96,-101.38 cw(c223.45,0.14) 144.74,-65 ; 211.96,-101.38 cw(c223.45,0.14) 144.74,-65 ; 211.96,-101.38 cw(c223.45,0.14) 144.74,-65 ; 208.82,101.24 ccw(c223.45,0.14) 131.18,44 ; 208.82,101.24 ccw(c223.45,0.14) 131.18,44 ; 208.82,101.24 ccw(c223.45,0.14) 131.18,44 ; 208.82,101.24 ccw(c223.45,0.14) 131.18,44 ; 144.74,-65 cw(c223.45,0.14) 135.01,-51.01 ; 144.74,-65 cw(c223.45,0.14) 135.01,-51.01 ; 144.74,-65 cw(c223.45,0.14) 135.01,-51.01 ; 144.74,-65 cw(c223.45,0.14) 135.01,-51.01 ; 135.01,-51.01 cw(c223.45,0.14) 126,-30.53 ; 135.01,-51.01 cw(c223.45,0.14) 126,-30.53 ; 135.01,-51.01 cw(c223.45,0.14) 126,-30.53 ; 135.01,-51.01 cw(c223.45,0.14) 126,-30.53 ; 131.18,44 ccw(c223.45,0.14) 128.95,38.95 ; 131.18,44 ccw(c223.45,0.14) 128.95,38.95 ; 131.18,44 ccw(c223.45,0.14) 128.95,38.95 ; 131.18,44 ccw(c223.45,0.14) 128.95,38.95 ; 128.95,38.95 ccw(c223.45,0.14) 127,33.82 ; 128.95,38.95 ccw(c223.45,0.14) 127,33.82 ; 128.95,38.95 ccw(c223.45,0.14) 127,33.82 ; 128.95,38.95 ccw(c223.45,0.14) 127,33.82 ; 127,33.82 ccw(c223.45,0.14) 122.81,17.73 ; 127,33.82 ccw(c223.45,0.14) 122.81,17.73 ; 127,33.82 ccw(c223.45,0.14) 122.81,17.73 ; 127,33.82 ccw(c223.45,0.14) 122.81,17.73 ; 126,-30.53 cw(c223.45,0.14) 121.29,1.29 ; 126,-30.53 cw(c223.45,0.14) 121.29,1.29 ; 126,-30.53 cw(c223.45,0.14) 121.29,1.29 ; 126,-30.53 cw(c223.45,0.14) 121.29,1.29 ; 122.81,17.73 ccw(c223.45,0.14) 121.46,6 ; 122.81,17.73 ccw(c223.45,0.14) 121.46,6 ; 122.81,17.73 ccw(c223.45,0.14) 121.46,6 ; 122.81,17.73 ccw(c223.45,0.14) 121.46,6 ; 121.46,6 ccw(c223.45,0.14) 121.29,1.29 ; 121.46,6 ccw(c223.45,0.14) 121.29,1.29 ; 121.46,6 ccw(c223.45,0.14) 121.29,1.29 ; 121.46,6 ccw(c223.45,0.14) 121.29,1.29
Button#9 [mil]
  round 10 smd: 1(120,0) 2(320,-40)
  Top Layer lines w10: 320.19,-12 320,-12 319,-12 294.28,-12 146,-12 ; 319,26 310.55,26 295.28,26 150,26 ; 312,-47 299.28,-47 160,-47 ; 304,6 127,6 126,6 ; 303,62 295.28,62 291.63,62 172,62 ; 291,-30 146.28,-30 133.78,-30 127,-30 ; 287,44 145.28,44 134,44 ; 268,-65 168.28,-65 149,-65 ; 211.96,-101.38 cw(c223.45,0.14) 144.74,-65 cw(c223.45,0.14) 135.01,-51.02 cw(c223.45,0.14) 126,-30.53 cw(c223.45,0.14) 123.17,-19.4 cw(c223.45,0.14) 121.29,1.29 cw(c223.45,0.14) 121.41,5.13 cw(c223.45,0.14) 121.46,6 cw(c223.45,0.14) 123.76,22.49 cw(c223.45,0.14) 127,33.82 cw(c223.45,0.14) 128.95,38.95 cw(c223.45,0.14) 129,39.07 cw(c223.45,0.14) 131.18,44 cw(c223.45,0.14) 208.82,101.24 ; 324.02,-12 ccw(c222.55,-0.14) 323.91,12.64 ; 324.02,-12 ccw(c222.55,-0.14) 323.91,12.64 ; 324.02,-12 cw(c222.55,-0.14) 323.57,-15.38 ; 324.02,-12 cw(c222.55,-0.14) 323.57,-15.38 ; 324.02,-12 cw(c222.55,-0.14) 323.57,-15.38 ; 324.02,-12 cw(c222.55,-0.14) 323.57,-15.38 ; 324.02,-12 ccw(c222.55,-0.14) 323.91,12.64 ; 324.02,-12 ccw(c222.55,-0.14) 323.91,12.64 ; 323.91,12.64 ccw(c222.55,-0.14) 320.28,29.64 ; 323.91,12.64 ccw(c222.55,-0.14) 320.28,29.64 ; 323.91,12.64 ccw(c222.55,-0.14) 320.28,29.64 ; 323.91,12.64 ccw(c222.55,-0.14) 320.28,29.64 ; 323.57,-15.38 cw(c222.55,-0.14) 320.28,-29.92 ; 323.57,-15.38 cw(c222.55,-0.14) 320.28,-29.92 ; 323.57,-15.38 cw(c222.55,-0.14) 320.28,-29.92 ; 323.57,-15.38 cw(c222.55,-0.14) 320.28,-29.92 ; 320.28,-29.92 cw(c222.55,-0.14) 320,-30.81 ; 320.28,-29.92 cw(c222.55,-0.14) 320,-30.81 ; 320.28,-29.92 cw(c222.55,-0.14) 320,-30.81 ; 320.28,-29.92 cw(c222.55,-0.14) 320,-30.81 ; 320.28,29.64 ccw(c222.55,-0.14) 320.19,29.92 ; 320.28,29.64 ccw(c222.55,-0.14) 320.19,29.92 ; 320.28,29.64 ccw(c222.55,-0.14) 320.19,29.92 ; 320.28,29.64 ccw(c222.55,-0.14) 320.19,29.92 ; 320.19,29.92 ccw(c222.55,-0.14) 320,30.53 ; 320.19,29.92 ccw(c222.55,-0.14) 320,30.53 ; 320.19,29.92 ccw(c222.55,-0.14) 320,30.53 ; 320.19,29.92 ccw(c222.55,-0.14) 320,30.53 ; 320,-30.81 cw(c222.55,-0.14) 319,-33.82 ; 320,-30.81 cw(c222.55,-0.14) 319,-33.82 ; 320,-30.81 cw(c222.55,-0.14) 319,-33.82 ; 320,-30.81 cw(c222.55,-0.14) 319,-33.82 ; 320,30.54 ccw(c222.55,-0.14) 318.4,35.23 ; 320,30.54 ccw(c222.55,-0.14) 318.4,35.23 ; 320,30.54 ccw(c222.55,-0.14) 318.4,35.23 ; 320,30.53 ccw(c222.55,-0.14) 318.4,35.23 ; 319,-33.82 cw(c222.55,-0.14) 315.53,-42.47 ; 319,-33.82 cw(c222.55,-0.14) 315.53,-42.47 ; 319,-33.82 cw(c222.55,-0.14) 315.53,-42.47 ; 319,-33.82 cw(c222.55,-0.14) 315.53,-42.47 ; 318.4,35.23 ccw(c222.55,-0.14) 305.5,59.5 ; 318.4,35.23 ccw(c222.55,-0.14) 305.5,59.5 ; 318.4,35.23 ccw(c222.55,-0.14) 305.5,59.5 ; 318.4,35.23 ccw(c222.55,-0.14) 305.5,59.5 ; 315.53,-42.47 cw(c222.55,-0.14) 314.65,-44.35 ; 315.53,-42.47 cw(c222.55,-0.14) 314.65,-44.35 ; 315.53,-42.47 cw(c222.55,-0.14) 314.65,-44.35 ; 315.53,-42.47 cw(c222.55,-0.14) 314.65,-44.35 ; 314.65,-44.35 cw(c222.55,-0.14) 313.67,-46.33 ; 314.65,-44.35 cw(c222.55,-0.14) 313.67,-46.33 ; 314.65,-44.35 cw(c222.55,-0.14) 313.67,-46.33 ; 314.65,-44.35 cw(c222.55,-0.14) 313.67,-46.33 ; 313.67,-46.33 cw(c222.55,-0.14) 268.74,-91.26 ; 313.67,-46.33 cw(c222.55,-0.14) 268.74,-91.26 ; 313.67,-46.33 cw(c222.55,-0.14) 268.74,-91.26 ; 313.67,-46.33 cw(c222.55,-0.14) 268.74,-91.26 ; 305.5,59.5 ccw(c222.55,-0.14) 303.64,62 ; 305.5,59.5 ccw(c222.55,-0.14) 303.64,62 ; 305.5,59.5 ccw(c222.55,-0.14) 303.64,62 ; 305.5,59.5 ccw(c222.55,-0.14) 303.64,62 ; 303.64,62 ccw(c222.55,-0.14) 257.92,95.71 ; 303.64,62 ccw(c222.55,-0.14) 257.92,95.71 ; 303.64,62 ccw(c222.55,-0.14) 257.92,95.71 ; 303.64,62 ccw(c222.55,-0.14) 257.92,95.71 ; 268.74,-91.26 cw(c222.55,-0.14) 238.02,-101.12 ; 268.74,-91.26 cw(c222.55,-0.14) 238.02,-101.12 ; 268.74,-91.26 cw(c222.55,-0.14) 238.02,-101.12 ; 268.74,-91.26 cw(c222.55,-0.14) 238.02,-101.12 ; 257.92,95.71 ccw(c222.55,-0.14) 235.89,101.15 ; 257.92,95.71 ccw(c222.55,-0.14) 235.89,101.15 ; 257.92,95.71 ccw(c222.55,-0.14) 235.89,101.15 ; 257.92,95.71 ccw(c222.55,-0.14) 235.89,101.15
Button#10 [mil]
  round 10 smd: 1(120,0) 2(320,-40)
  Top Layer lines w10: 320.19,-12 146,-12 ; 319,26 150,26 ; 312,-47 160,-47 ; 304,6 126,6 ; 303,62 215.11,62 172,62 ; 291,-30 127,-30 ; 287,44 134,44 ; 268,-65 149,-65 ; 238.02,-101.12 ccw(c222.55,-0.14) 313.33,-47 ccw(c222.55,-0.14) 314.55,-44.56 ccw(c222.55,-0.14) 324.43,-7.77 ccw(c222.55,-0.14) 324.61,-4.79 ccw(c222.55,-0.14) 324.61,4.52 ccw(c222.55,-0.14) 322.08,22.92 ccw(c222.55,-0.14) 321.31,26 ccw(c222.55,-0.14) 303.64,62 ccw(c222.55,-0.14) 235.89,101.15 ; 211.96,-101.38 cw(c223.45,0.14) 144.74,-65 ; 211.96,-101.38 cw(c223.45,0.14) 144.74,-65 ; 211.96,-101.38 cw(c223.45,0.14) 144.74,-65 ; 211.96,-101.38 cw(c223.45,0.14) 144.74,-65 ; 208.82,101.24 ccw(c223.45,0.14) 179.95,92.57 ; 208.82,101.24 ccw(c223.45,0.14) 179.95,92.57 ; 208.82,101.24 ccw(c223.45,0.14) 179.94,92.57 ; 208.82,101.24 ccw(c223.45,0.14) 179.95,92.57 ; 179.94,92.57 ccw(c223.45,0.14) 131.18,44 ; 179.94,92.57 ccw(c223.45,0.14) 131.18,44 ; 179.94,92.57 ccw(c223.45,0.14) 131.18,44 ; 179.94,92.57 ccw(c223.45,0.14) 131.18,44 ; 144.74,-65 cw(c223.45,0.14) 135.01,-51.01 ; 144.74,-65 cw(c223.45,0.14) 135.01,-51.01 ; 144.74,-65 cw(c223.45,0.14) 135.01,-51.01 ; 144.74,-65 cw(c223.45,0.14) 135.01,-51.01 ; 135.01,-51.01 cw(c223.45,0.14) 125.83,-30 ; 135.01,-51.01 cw(c223.45,0.14) 125.83,-30 ; 135.01,-51.01 cw(c223.45,0.14) 125.83,-30 ; 135.01,-51.01 cw(c223.45,0.14) 125.83,-30 ; 131.18,44 ccw(c223.45,0.14) 128.95,38.95 ; 131.18,44 ccw(c223.45,0.14) 128.95,38.95 ; 131.18,44 ccw(c223.45,0.14) 128.95,38.95 ; 131.18,44 ccw(c223.45,0.14) 128.95,38.95 ; 128.95,38.95 ccw(c223.45,0.14) 121.46,6 ; 128.95,38.95 ccw(c223.45,0.14) 121.46,6 ; 128.95,38.95 ccw(c223.45,0.14) 121.46,6 ; 128.95,38.95 ccw(c223.45,0.14) 121.46,6 ; 125.83,-30 cw(c223.45,0.14) 125.33,-28.33 ; 125.83,-30 cw(c223.45,0.14) 125.33,-28.33 ; 125.83,-30 cw(c223.45,0.14) 125.33,-28.33 ; 125.83,-30 cw(c223.45,0.14) 125.33,-28.33 ; 125.33,-28.33 cw(c223.45,0.14) 121.29,1.29 ; 125.33,-28.33 cw(c223.45,0.14) 121.29,1.29 ; 125.33,-28.33 cw(c223.45,0.14) 121.29,1.29 ; 125.33,-28.33 cw(c223.45,0.14) 121.29,1.29 ; 121.46,6 ccw(c223.45,0.14) 121.29,1.29 ; 121.46,6 ccw(c223.45,0.14) 121.29,1.29 ; 121.46,6 ccw(c223.45,0.14) 121.29,1.29 ; 121.46,6 ccw(c223.45,0.14) 121.29,1.29
Button#11 [mil]
  round 10 smd: 1(120,0) 2(320,-40)
  Top Layer lines w7: 320.19,-12 146,-12 ; 319,26 150,26 ; 312,-47 160,-47 ; 303,62 302,62 172,62
  Top Layer lines w10: 304,6 134.06,6 127,6 126,6 ; 291,-30 133.56,-30 127,-30 ; 287,44 134,44 ; 268,-65 226.96,-65 184.06,-65 149,-65 ; 238.02,-101.12 ccw(c222.55,-0.14) 314.65,-44.35 ccw(c222.55,-0.14) 316.61,-40 ccw(c222.55,-0.14) 320.19,-30.19 ccw(c222.55,-0.14) 324.43,-7.76 ccw(c222.55,-0.14) 322.08,22.92 ccw(c222.55,-0.14) 319,33.55 ccw(c222.55,-0.14) 307.73,56.27 ccw(c222.55,-0.14) 303.36,62.36 ccw(c222.55,-0.14) 278.95,85.05 ccw(c222.55,-0.14) 259.78,95 ccw(c222.55,-0.14) 235.89,101.15 ; 211.96,-101.38 cw(c223.45,0.14) 193.56,-97.56 cw(c223.45,0.14) 186.22,-95 cw(c223.45,0.14) 135.02,-51.02 cw(c223.45,0.14) 127,-33.55 cw(c223.45,0.14) 123.23,-19.67 cw(c223.45,0.14) 121.51,-6.55 cw(c223.45,0.14) 121.29,0 cw(c223.45,0.14) 126,30.8 cw(c223.45,0.14) 127,33.82 cw(c223.45,0.14) 128.95,38.95 cw(c223.45,0.14) 131.18,44 cw(c223.45,0.14) 208.82,101.24
Button#12 [mil]
  round 10 smd: 1(120,0) 2(320,-40)
  Top Layer lines w10: 320.19,-12 314.5,-12 294,-12 146,-12 ; 319,26 314.5,26 150,26 ; 312,-47 304,-47 160,-47 ; 304,6 137,6 127,6 126,6 ; 303,62 291.75,62 214.5,62 172,62 ; 291,-30 148.5,-30 142,-30 127,-30 ; 287,44 168.5,44 134,44 ; 268,-65 155.5,-65 149,-65 ; 238.02,-101.12 ccw(c222.55,-0.14) 313.33,-47 ccw(c222.55,-0.14) 324.7,-1.8 ccw(c222.55,-0.14) 323.22,17.28 ccw(c222.55,-0.14) 320.19,29.92 ccw(c222.55,-0.14) 319,33.55 ccw(c222.55,-0.14) 305.5,59.5 ccw(c222.55,-0.14) 291.75,75.02 ccw(c222.55,-0.14) 235.89,101.15 ; 211.95,-101.38 cw(c223.45,0.14) 172.3,-88.3 cw(c223.45,0.14) 144.74,-65 cw(c223.45,0.14) 121.29,1.29 cw(c223.45,0.14) 121.46,6 cw(c223.45,0.14) 127,33.82 cw(c223.45,0.14) 127.5,35.22 cw(c223.45,0.14) 128.95,38.95 cw(c223.45,0.14) 208.82,101.24
Button#13 [mil]
  round 10 smd: 1(120,0) 2(320,-40)
  Top Layer lines w10: 320.19,-12 312.9,-12 146,-12 ; 319,26 304.9,26 150,26 ; 312,-47 160,-47 ; 304,6 146.9,6 127,6 126.9,6 126,6 ; 303,62 301.9,62 296.9,62 290.9,62 172,62 ; 291,-30 141.4,-30 134.9,-30 127,-30 ; 287,44 134,44 ; 268,-65 232.4,-65 151.9,-65 149,-65 ; 238.02,-101.12 ccw(c222.55,-0.14) 268.74,-91.26 ccw(c222.55,-0.14) 313.67,-46.33 ccw(c222.55,-0.14) 324.71,-0.19 ccw(c222.55,-0.14) 324.5,6.4 ccw(c222.55,-0.14) 320.19,29.92 ccw(c222.55,-0.14) 319,33.55 ccw(c222.55,-0.14) 318.81,34.09 ccw(c222.55,-0.14) 314.49,44.41 ccw(c222.55,-0.14) 305.5,59.5 ccw(c222.55,-0.14) 235.89,101.15 ; 211.95,-101.38 cw(c223.45,0.14) 135.01,-51.01 cw(c223.45,0.14) 126.9,-33.26 cw(c223.45,0.14) 121.84,-10.44 cw(c223.45,0.14) 121.29,0 cw(c223.45,0.14) 121.43,5.53 cw(c223.45,0.14) 125.1,27.8 cw(c223.45,0.14) 127,33.82 cw(c223.45,0.14) 128.95,38.95 cw(c223.45,0.14) 129.26,39.7 cw(c223.45,0.14) 208.82,101.24
Button#14 [mil]
  round 10 smd: 1(120,0) 2(320,-40)
  Top Layer lines w7: 320.19,-12 319,-12 318.6,-12 317.6,-12 146,-12 ; 319,26 318.6,26 317.6,26 150,26 ; 312,-47 305.1,-47 291.6,-47 284.6,-47 160,-47 ; 303,62 301.6,62 270.6,62 264.6,62 172,62
  Top Layer lines w10: 304,6 136.1,6 128.6,6 127,6 126,6 ; 291,-30 148.6,-30 143.1,-30 128.6,-30 127,-30 ; 287,44 134,44 ; 268,-65 151.6,-65 149,-65 ; 238.02,-101.12 ccw(c222.55,-0.14) 314.65,-44.35 ccw(c222.55,-0.14) 316.61,-40 ccw(c222.55,-0.14) 318.6,-34.94 ccw(c222.55,-0.14) 319,-33.82 ccw(c222.55,-0.14) 321.6,-25.16 ccw(c222.55,-0.14) 324.3,-9.33 ; 211.96,-101.38 cw(c223.45,0.14) 209,-101 cw(c223.45,0.14) 135.01,-51.01 cw(c223.45,0.14) 128.6,-37.82 cw(c223.45,0.14) 121.29,1.29 cw(c223.45,0.14) 121.46,6 cw(c223.45,0.14) 126,30.81 cw(c223.45,0.14) 127,33.82 cw(c223.45,0.14) 128.6,38.09 cw(c223.45,0.14) 128.95,38.95 cw(c223.45,0.14) 131.18,44 cw(c223.45,0.14) 208.82,101.24 ; 324.7,-2.02 cw(c222.55,-0.14) 324.3,-9.33 ; 324.7,-2.02 cw(c222.55,-0.14) 324.3,-9.33 ; 324.7,-2.02 ccw(c222.55,-0.14) 318.6,34.67 ; 324.7,-2.02 ccw(c222.55,-0.14) 318.6,34.67 ; 318.6,34.67 ccw(c222.55,-0.14) 317.6,37.32 ; 318.6,34.67 ccw(c222.55,-0.14) 317.6,37.32 ; 317.6,37.32 ccw(c222.55,-0.14) 308.48,55.12 ; 317.6,37.32 ccw(c222.55,-0.14) 308.48,55.12 ; 308.48,55.12 ccw(c222.55,-0.14) 305.5,59.5 ; 308.48,55.12 ccw(c222.55,-0.14) 305.5,59.5 ; 305.5,59.5 ccw(c222.55,-0.14) 235.89,101.15 cw(c222.55,-0.14) 305.5,59.5
Button#15 [mil]
  round 10 smd: 1(120,0) 2(320,-40)
  Top Layer lines w10: 320.19,-12 320,-12 304.5,-12 146,-12 ; 319,26 301,26 150,26 ; 312,-47 304.5,-47 291,-47 284,-47 160,-47 ; 304,6 130,6 127,6 126,6 ; 303,62 291,62 172,62 ; 291,-30 153.5,-30 142,-30 127,-30 ; 287,44 141,44 134,44 ; 268,-65 226.5,-65 149,-65 ; 211.96,-101.38 cw(c223.45,0.14) 209,-101 cw(c223.45,0.14) 144.74,-65 cw(c223.45,0.14) 143.5,-63.47 cw(c223.45,0.14) 135.01,-51.01 cw(c223.45,0.14) 125.99,-30.5 cw(c223.45,0.14) 121.29,1.29 cw(c223.45,0.14) 121.46,6 cw(c223.45,0.14) 125.23,28.23 cw(c223.45,0.14) 126,30.81 cw(c223.45,0.14) 126.57,32.57 cw(c223.45,0.14) 127,33.82 cw(c223.45,0.14) 128.95,38.95 cw(c223.45,0.14) 128.97,39 cw(c223.45,0.14) 208.82,101.24 ; 324.43,-7.76 ccw(c222.55,-0.14) 322.08,22.92 ; 324.43,-7.76 ccw(c222.55,-0.14) 322.08,22.92 ; 324.43,-7.76 ccw(c222.55,-0.14) 322.08,22.92 ; 324.43,-7.76 cw(c222.55,-0.14) 320.19,-30.19 ; 324.43,-7.76 cw(c222.55,-0.14) 320.19,-30.19 ; 324.43,-7.76 ccw(c222.55,-0.14) 322.08,22.92 ; 324.43,-7.76 cw(c222.55,-0.14) 320.19,-30.19 ; 324.43,-7.76 cw(c222.55,-0.14) 320.19,-30.19 ; 322.08,22.92 ccw(c222.55,-0.14) 322,23.25 ; 322.08,22.92 ccw(c222.55,-0.14) 322,23.25 ; 322.08,22.92 ccw(c222.55,-0.14) 322,23.25 ; 322.08,22.92 ccw(c222.55,-0.14) 322,23.25 ; 322,23.25 ccw(c222.55,-0.14) 320.19,29.92 ; 322,23.25 ccw(c222.55,-0.14) 320.19,29.92 ; 322,23.25 ccw(c222.55,-0.14) 320.19,29.92 ; 322,23.25 ccw(c222.55,-0.14) 320.19,29.92 ; 320.19,-30.19 cw(c222.55,-0.14) 320,-30.81 ; 320.19,-30.19 cw(c222.55,-0.14) 320,-30.81 ; 320.19,-30.19 cw(c222.55,-0.14) 320,-30.81 ; 320.19,-30.19 cw(c222.55,-0.14) 320,-30.81 ; 320.19,29.92 ccw(c222.55,-0.14) 320,30.53 ; 320.19,29.92 ccw(c222.55,-0.14) 320,30.53 ; 320.19,29.92 ccw(c222.55,-0.14) 320,30.53 ; 320.19,29.92 ccw(c222.55,-0.14) 320,30.53 ; 320,-30.81 cw(c222.55,-0.14) 316.61,-40 ; 320,-30.81 cw(c222.55,-0.14) 316.61,-40 ; 320,-30.81 cw(c222.55,-0.14) 316.61,-40 ; 320,-30.81 cw(c222.55,-0.14) 316.61,-40 ; 320,30.53 ccw(c222.55,-0.14) 305.5,59.5 ; 320,30.53 ccw(c222.55,-0.14) 305.5,59.5 ; 320,30.53 ccw(c222.55,-0.14) 305.5,59.5 ; 320,30.53 ccw(c222.55,-0.14) 305.5,59.5 ; 316.61,-40 cw(c222.55,-0.14) 313.67,-46.33 ; 316.61,-40 cw(c222.55,-0.14) 313.67,-46.33 ; 316.61,-40 cw(c222.55,-0.14) 313.67,-46.33 ; 316.61,-40 cw(c222.55,-0.14) 313.67,-46.33 ; 313.67,-46.33 cw(c222.55,-0.14) 238.02,-101.12 ; 313.67,-46.33 cw(c222.55,-0.14) 238.02,-101.12 ; 313.67,-46.33 cw(c222.55,-0.14) 238.02,-101.12 ; 313.67,-46.33 cw(c222.55,-0.14) 238.02,-101.12 ; 305.5,59.5 ccw(c222.55,-0.14) 235.89,101.15 ; 305.5,59.5 ccw(c222.55,-0.14) 235.89,101.15 ; 305.5,59.5 ccw(c222.55,-0.14) 235.89,101.15 ; 305.5,59.5 ccw(c222.55,-0.14) 235.89,101.15
Button#16 [mil]
  round 10 smd: 1(120,0) 2(320,-40)
  Top Layer lines w10: 320.19,-12 319,-12 318,-12 146,-12 ; 319,26 314,26 150,26 ; 312,-47 292,-47 285,-47 160,-47 ; 304,6 140,6 127,6 126,6 ; 303,62 302.5,62 290,62 252.5,62 201,62 172,62 ; 291,-30 145.5,-30 140,-30 127,-30 ; 287,44 134,44 ; 268,-65 149,-65 ; 238.02,-101.12 ccw(c222.55,-0.14) 314.65,-44.35 ccw(c222.55,-0.14) 316.61,-40 ccw(c222.55,-0.14) 319,-33.82 ccw(c222.55,-0.14) 320.19,-30.19 ccw(c222.55,-0.14) 324.43,-7.76 ccw(c222.55,-0.14) 322.08,22.92 ccw(c222.55,-0.14) 320.19,29.92 ccw(c222.55,-0.14) 319,33.55 ccw(c222.55,-0.14) 306.69,57.81 ccw(c222.55,-0.14) 305.5,59.5 ccw(c222.55,-0.14) 235.89,101.15 ; 211.96,-101.38 cw(c223.45,0.14) 135.01,-51.01 cw(c223.45,0.14) 121.29,1.29 cw(c223.45,0.14) 121.46,6 cw(c223.45,0.14) 127,33.82 cw(c223.45,0.14) 128.95,38.95 cw(c223.45,0.14) 131.18,44 cw(c223.45,0.14) 208.82,101.24
Button#17 [mil]
  round 10 smd: 1(120,0) 2(320,-40)
  Top Layer lines w10: 320.19,-12 318,-12 146,-12 ; 319,26 150,26 ; 312,-47 300.5,-47 292,-47 284,-47 160,-47 ; 304,6 127,6 126,6 ; 303,62 302,62 293,62 172,62 ; 291,-30 143.5,-30 134,-30 127,-30 ; 287,44 134,44 ; 268,-65 169,-65 155.5,-65 149,-65 ; 238.02,-101.12 ccw(c222.55,-0.14) 316.61,-40 ccw(c222.55,-0.14) 322,-23.52 ccw(c222.55,-0.14) 324.58,-5.42 ccw(c222.55,-0.14) 322,23.25 ccw(c222.55,-0.14) 320.19,29.92 ccw(c222.55,-0.14) 319,33.55 ccw(c222.55,-0.14) 317.55,37.45 ccw(c222.55,-0.14) 307.73,56.27 ccw(c222.55,-0.14) 305.5,59.5 ccw(c222.55,-0.14) 282.18,82.82 ccw(c222.55,-0.14) 260.14,94.86 ccw(c222.55,-0.14) 247.23,99 ccw(c222.55,-0.14) 237,101 ccw(c222.55,-0.14) 235.89,101.15 ; 211.96,-101.38 cw(c223.45,0.14) 172.3,-88.3 cw(c223.45,0.14) 142.36,-62 cw(c223.45,0.14) 123.12,-19.12 cw(c223.45,0.14) 121.29,1.29 cw(c223.45,0.14) 121.42,5.42 cw(c223.45,0.14) 121.46,6 cw(c223.45,0.14) 127,33.82 cw(c223.45,0.14) 128.95,38.95 cw(c223.45,0.14) 131.18,44 cw(c223.45,0.14) 208.82,101.24
Button#18 [mil]
  round 10 smd: 1(120,0) 2(320,-40)
  Top Layer lines w7: 320.19,-12 319,-12 304.5,-12 146,-12 ; 319,26 150,26 ; 312,-47 304.5,-47 160,-47 ; 303,62 302,62 301,62 172,62
  Top Layer lines w10: 304,6 143,6 129,6 127,6 126,6 ; 291,-30 139,-30 134,-30 129,-30 127,-30 ; 287,44 134,44 ; 268,-65 180.5,-65 155.5,-65 149,-65 ; 238.02,-101.12 ccw(c222.55,-0.14) 314.65,-44.35 ccw(c222.55,-0.14) 316.61,-40 ccw(c222.55,-0.14) 319,-33.82 ccw(c222.55,-0.14) 323.57,-15.38 ccw(c222.55,-0.14) 319,33.55 ccw(c222.55,-0.14) 309.5,53.5 ccw(c222.55,-0.14) 307.73,56.27 ccw(c222.55,-0.14) 305.5,59.5 ccw(c222.55,-0.14) 282.18,82.82 ccw(c222.55,-0.14) 237,101 ccw(c222.55,-0.14) 235.89,101.15 ; 211.95,-101.38 cw(c223.45,0.14) 185.03,-94.53 cw(c223.45,0.14) 135.01,-51.01 cw(c223.45,0.14) 129,-38.81 cw(c223.45,0.14) 126.11,-30.89 cw(c223.45,0.14) 121.29,1.29 cw(c223.45,0.14) 121.46,6 cw(c223.45,0.14) 126,30.81 cw(c223.45,0.14) 127,33.82 cw(c223.45,0.14) 128.95,38.95 cw(c223.45,0.14) 131.18,44 cw(c223.45,0.14) 159.74,80 cw(c223.45,0.14) 207.22,101 cw(c223.45,0.14) 208.82,101.24
Button#19 [mil]
  round 10 smd: 1(120,0) 2(320,-40)
  Top Layer lines w10: 320.19,-12 320,-12 317,-12 146,-12 ; 319,26 313,26 150,26 ; 312,-47 292,-47 285,-47 160,-47 ; 304,6 139,6 131.57,6 127,6 126,6 ; 303,62 172,62 ; 291,-30 151.5,-30 143,-30 131.15,-30 127,-30 ; 287,44 157,44 134,44 ; 268,-65 167,-65 155.5,-65 149,-65 ; 238.02,-101.12 ccw(c222.55,-0.14) 316.61,-40 ccw(c222.55,-0.14) 320,-30.81 ccw(c222.55,-0.14) 322.79,-19.88 ccw(c222.55,-0.14) 324.43,-7.76 ccw(c222.55,-0.14) 324.66,-3.38 ccw(c222.55,-0.14) 323.51,15.49 ccw(c222.55,-0.14) 322.08,22.92 ccw(c222.55,-0.14) 320,30.53 ccw(c222.55,-0.14) 319,33.55 ccw(c222.55,-0.14) 305.5,59.5 ccw(c222.55,-0.14) 303.64,62 ccw(c222.55,-0.14) 282.18,82.82 ccw(c222.55,-0.14) 237,101 ccw(c222.55,-0.14) 235.89,101.15 ; 211.96,-101.38 cw(c223.45,0.14) 206.93,-100.68 cw(c223.45,0.14) 201.68,-99.68 cw(c223.45,0.14) 172.3,-88.3 cw(c223.45,0.14) 131.14,-43.64 cw(c223.45,0.14) 131,-43.34 cw(c223.45,0.14) 121.29,1.29 cw(c223.45,0.14) 121.46,6 cw(c223.45,0.14) 127,33.82 cw(c223.45,0.14) 128.95,38.95 cw(c223.45,0.14) 130.68,42.93 cw(c223.45,0.14) 156,76.87 cw(c223.45,0.14) 208.82,101.24